# Altium PCB TVP5150AM1.PcbDoc
Units mm, origin at the board's own origin, x right, y up, seen from the top; angles counter-clockwise.
Board outline 55.24 x 53.97 mm, 2 copper layers (Top Layer, Bottom Layer), stack 1.571 mm thick; 45 components, 39 nets, 160 pads, 217 vias.
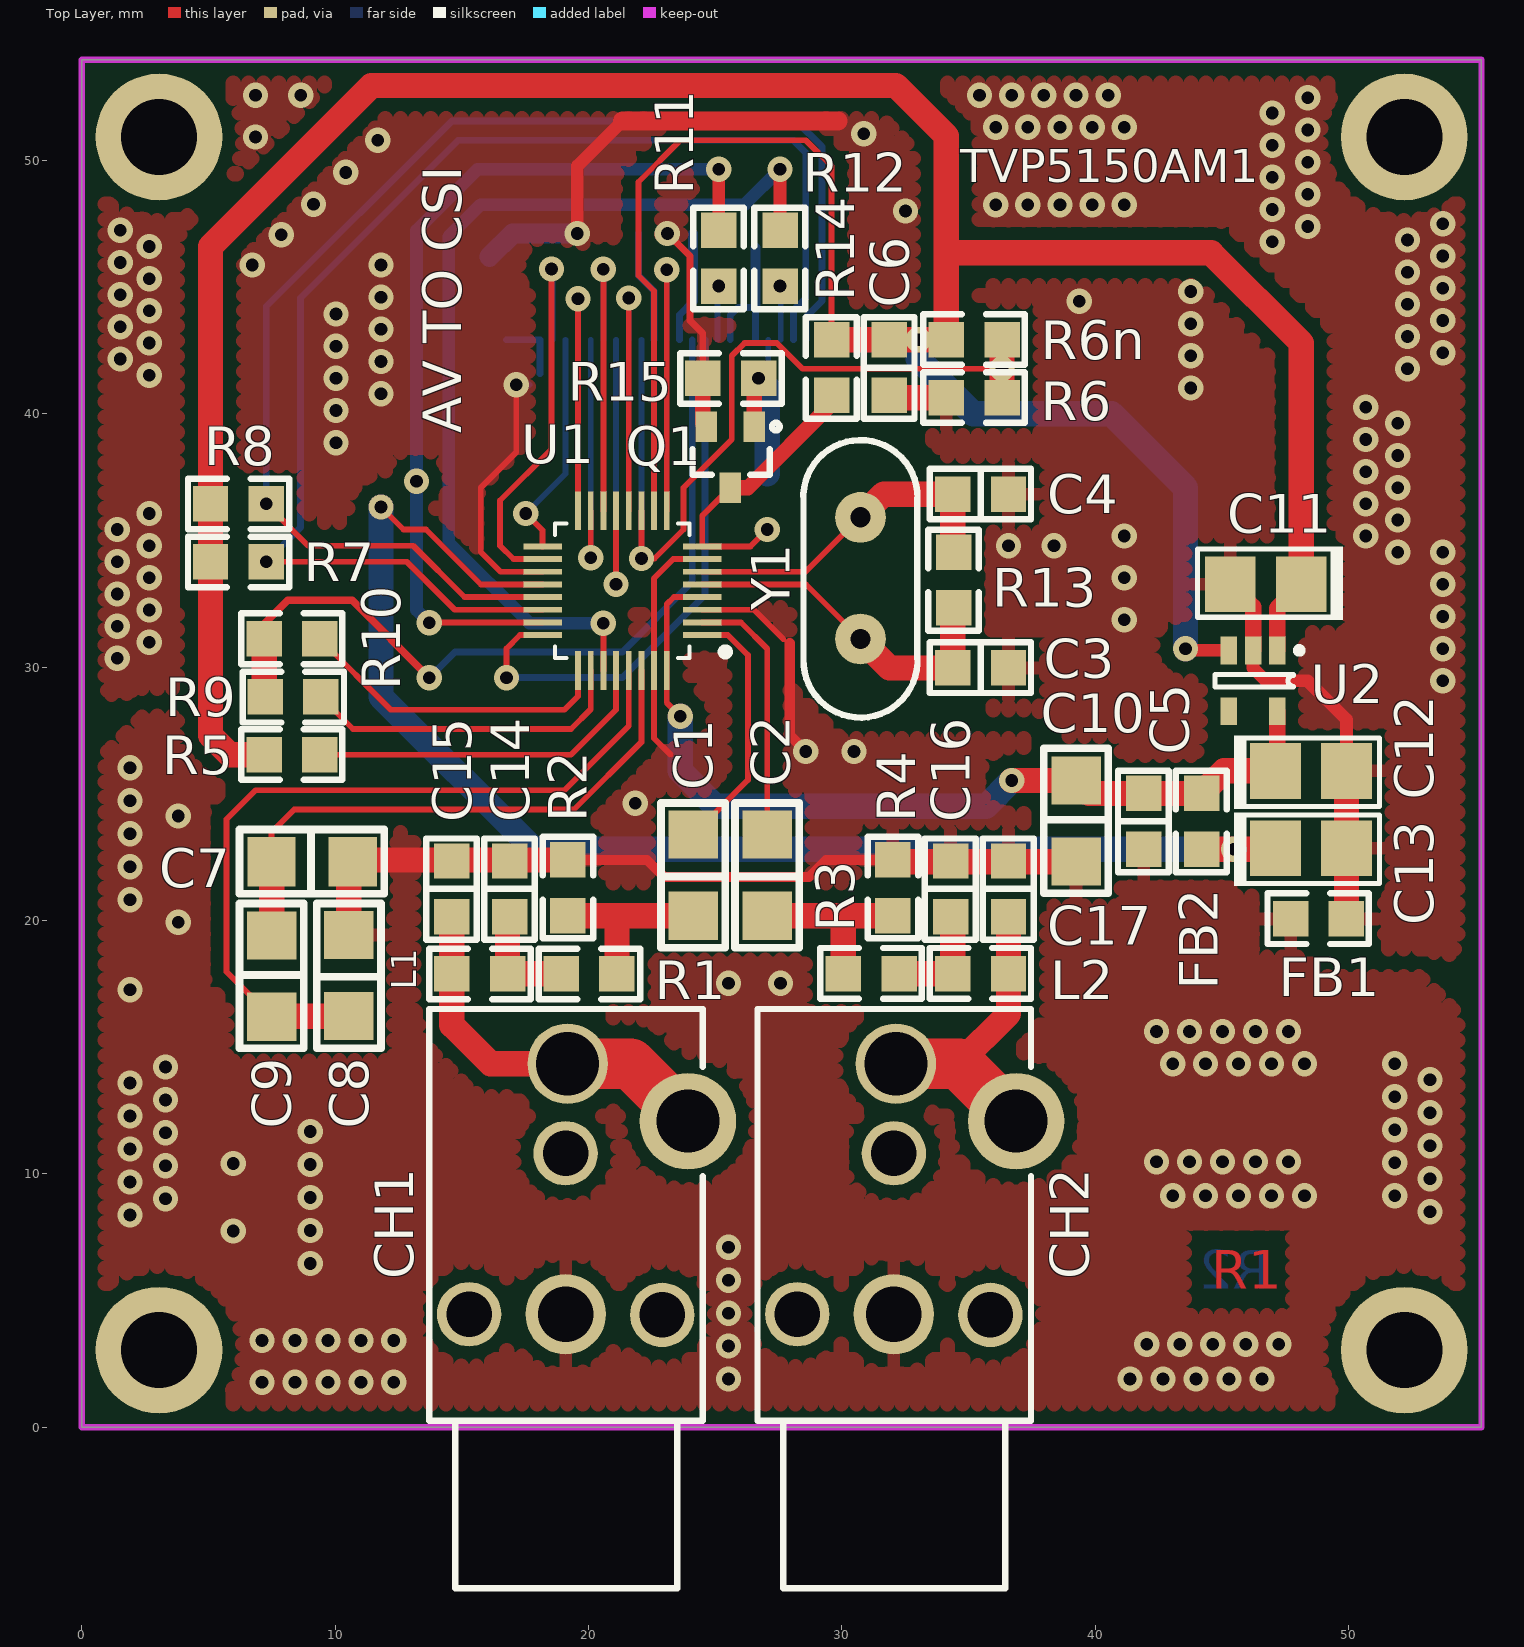
[diagram p0: Top Layer view]
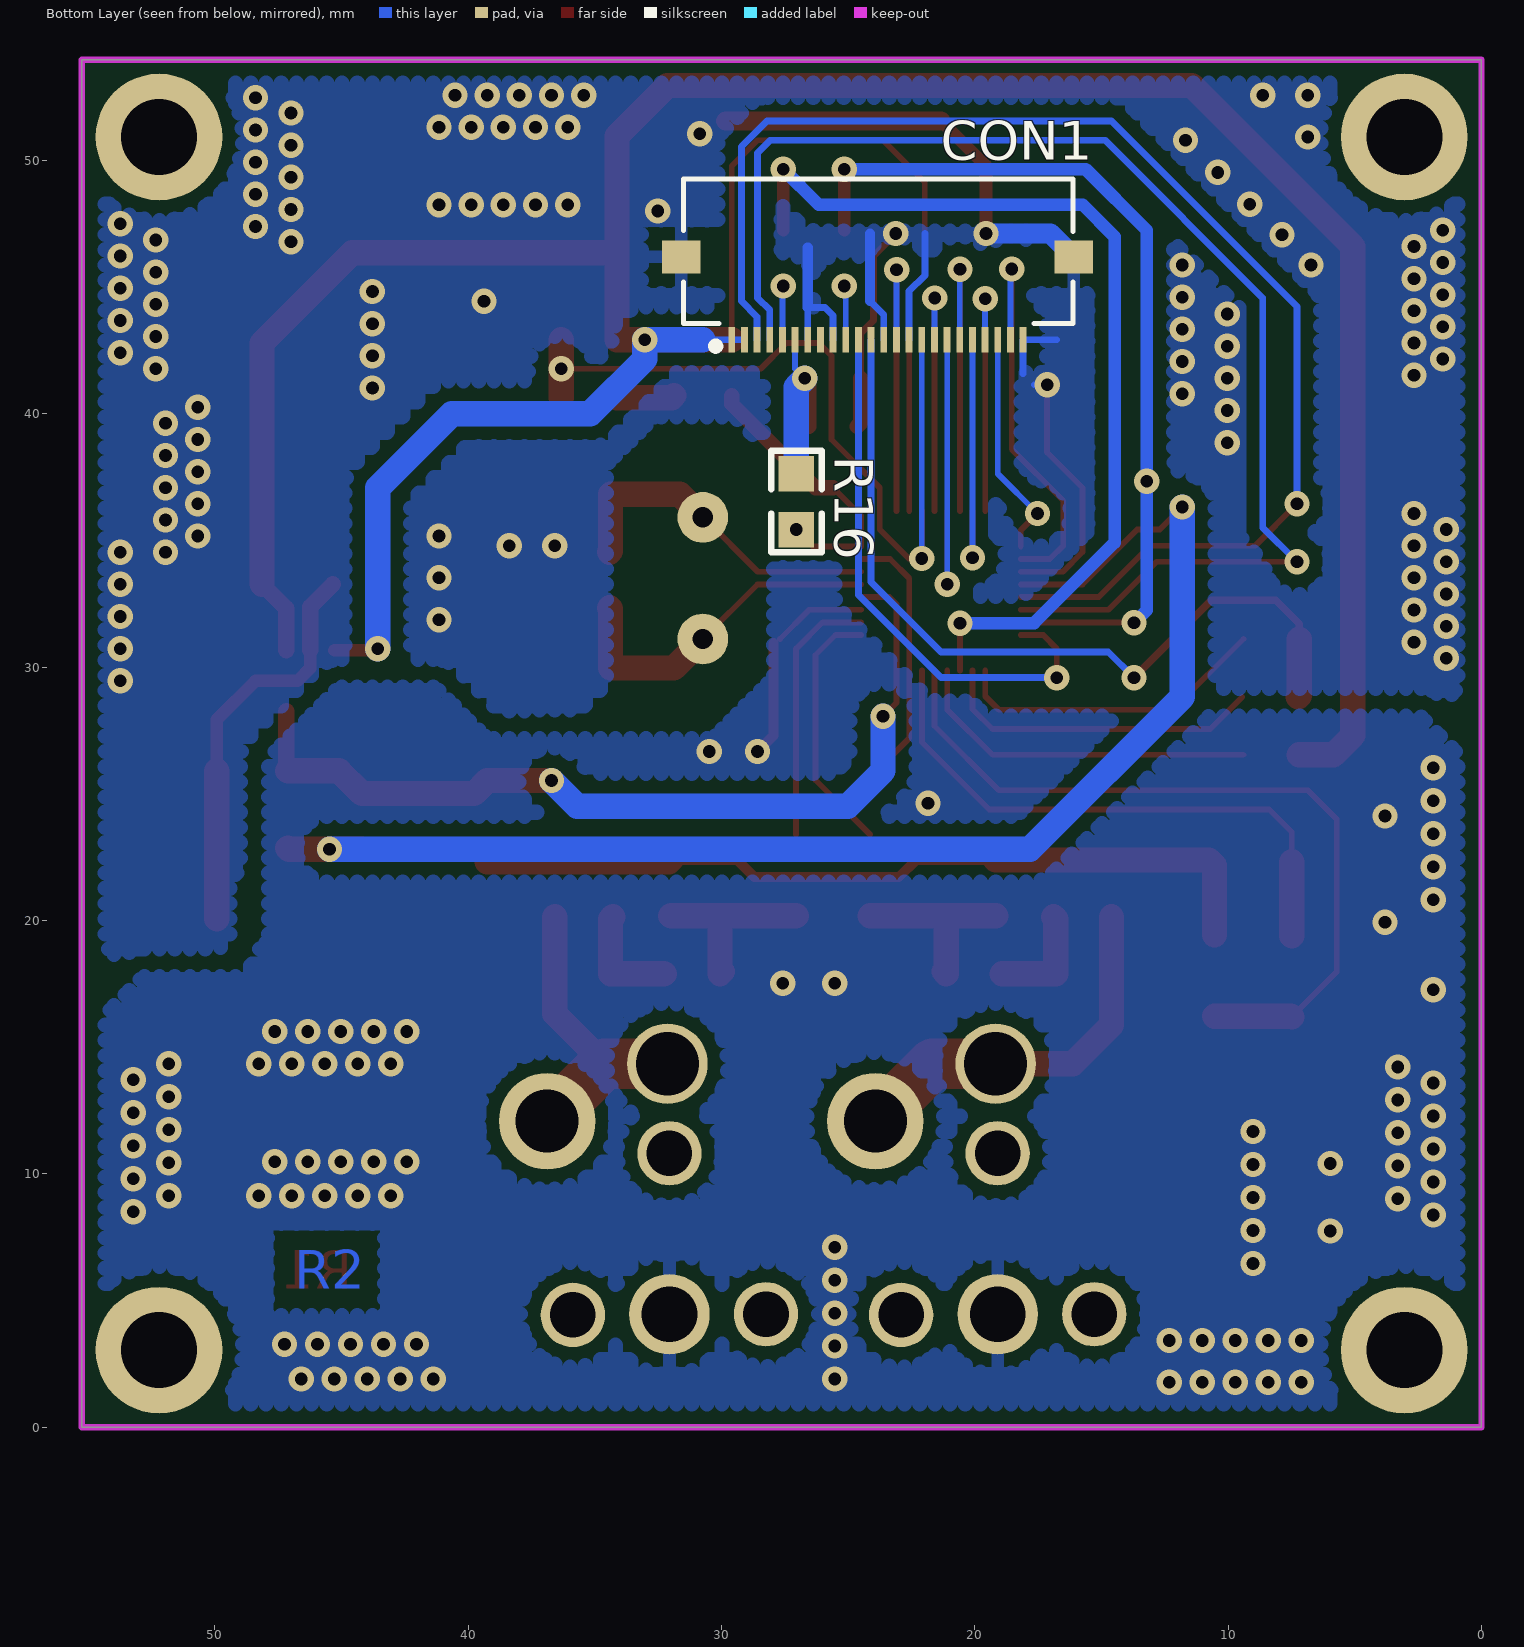
[diagram p1: Bottom Layer view, seen from below]
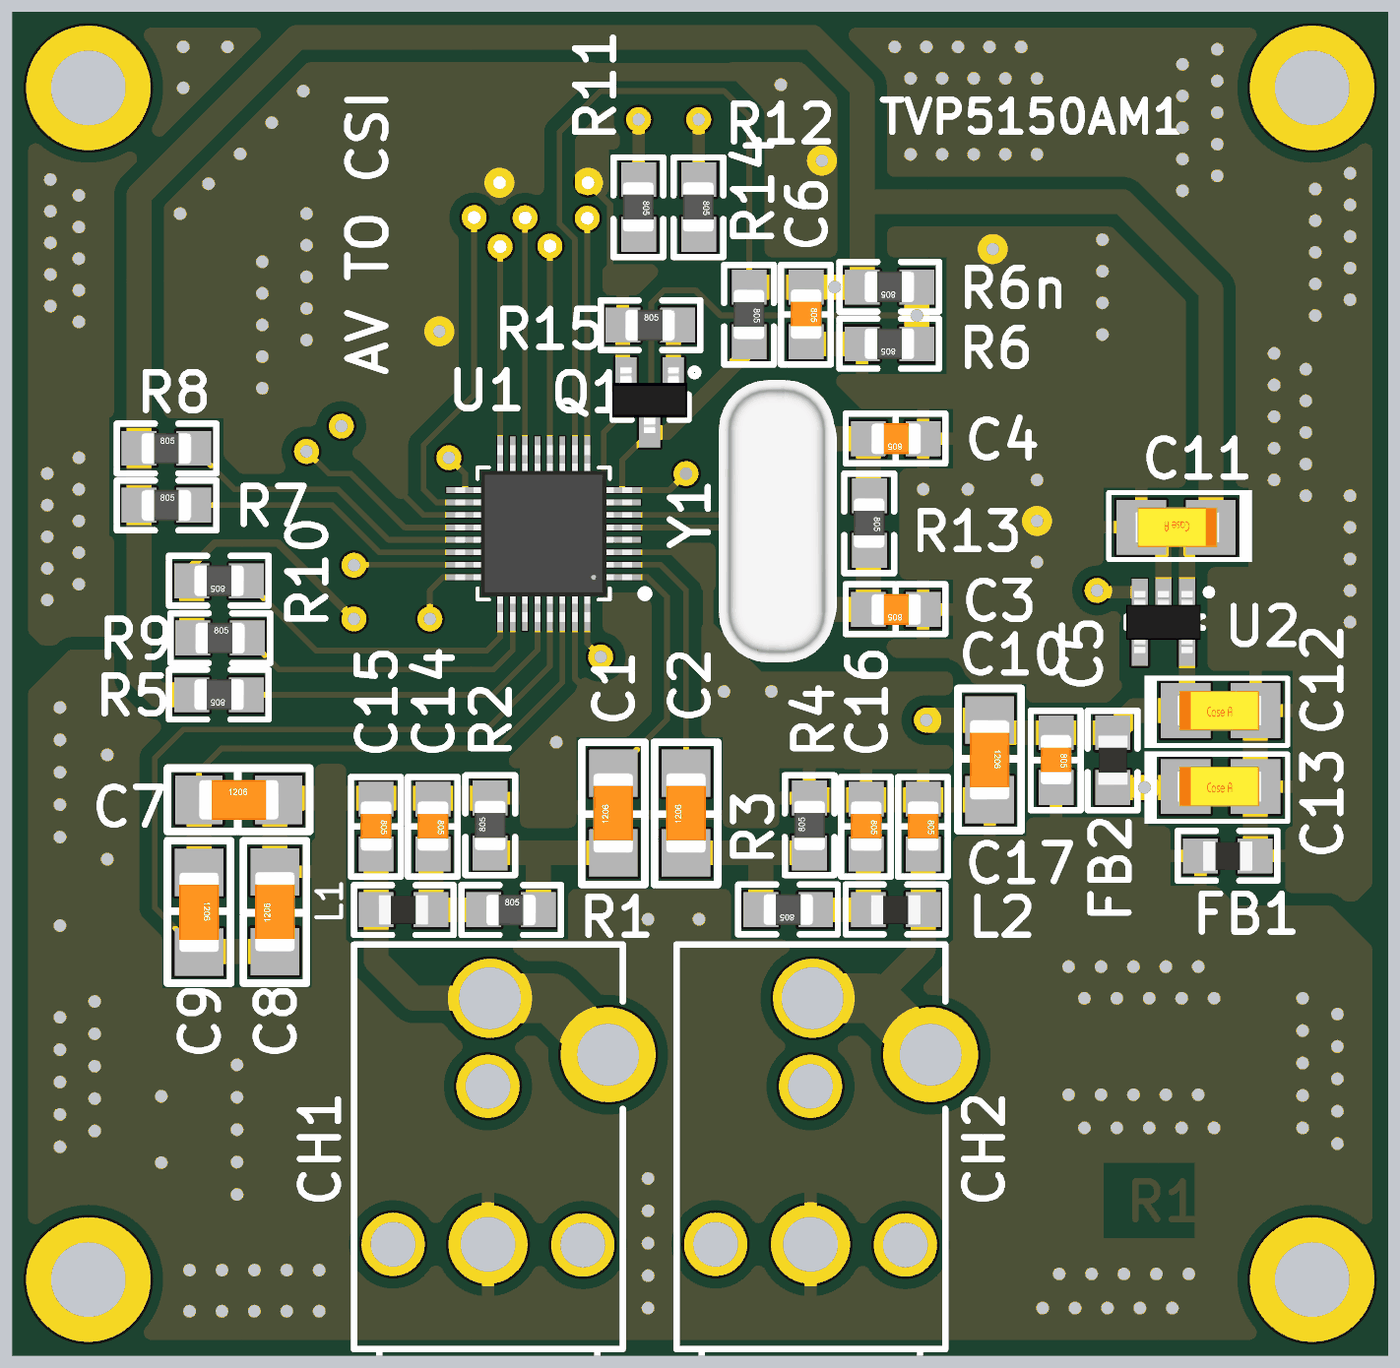
[diagram p2: 3D render of the assembled board from above, using the file's embedded part models]

## Layer stack, top to bottom
Top Solder: solder mask 0.0102, Solder Resist, Dk 3.5
Top Layer: signal copper 0.0356
Dielectric 1: dielectric 1.5, FR-4, Dk 4.8
Bottom Layer: signal copper 0.0356
Bottom Solder: solder mask 0.0102, Solder Resist, Dk 3.5

## Board outline
0,0 0,53.975 55.245,53.975 55.245,0

## Design rules (kind name [scope] priority, off if disabled: settings)
Clearance In_poly [InPolygon] p1: gap=0.5
Clearance [All] p2: gap=0.22
HoleSize [All] p1: absolutevalues=TRUE maxlimit=5 minlimit=0.025 maxpercent=80.000 minpercent=20.000
MinimumSolderMaskSliver [All] p1: minsoldermaskwidth=0.1
PolygonConnect poly_via [IsVia or InPadClass('Direct Connects')] p1: connectstyle=Direct reliefconductorwidth=0.254 reliefentries=4 polygonreliefangle="90 Angle" airgapwidth=0.254
PolygonConnect [All] p2: connectstyle=Relief reliefconductorwidth=0.5 reliefentries=4 polygonreliefangle="90 Angle" airgapwidth=0.5
RoutingVias [All] p1: holewidth=0.5 width=1 viastyle="Through Hole" minholewidth=0.5 minwidth=1 maxholewidth=0.711 maxwidth=1.27
SilkToSilkClearance [All] p1: silktosilkclearance=0.1
SilkToSolderMaskClearance [IsPad] p1: minsilkscreentomaskgap=0.05 clearancetoexposedcopper=TRUE
SolderMaskExpansion [All] p1: expansion=0.102
Width [All] p1: maxlimit=5 minlimit=0.229 preferedwidth=0.254 minimp=50.000000 maximp=50.000000 favimp=50.000000
26 further rules are at their usual default settings.

## Components (designator, comment, footprint, x,y, rotation, side; value= is the part's Value field where it differs from the comment)
C1 "100nF" "C_1206 (3216 METRIC)" 24.13,20.193 r90 top
C2 "100nF" "C_1206 (3216 METRIC)" 27.051,20.193 r90 top
C3 "27PF" "C_0805 (2012 METRIC)" 36.576,29.972 r180 top
C4 "27PF" "C_0805 (2012 METRIC)" 36.576,36.83 r180 top
C5 "100nF" "C_0805 (2012 METRIC)" 41.91,25.019 r270 top
C6 "1000nF" "C_0805 (2012 METRIC)" 31.877,42.926 r270 top
C7 "1uF" "C_1206 (3216 METRIC)" 7.493,22.327 r0 top
C8 "1uF" "C_1206 (3216 METRIC)" 10.541,16.231 r90 top
C9 "1uF" "C_1206 (3216 METRIC)" 7.493,19.406 r270 top
C10 "100nF" "C_1206 (3216 METRIC)" 39.243,25.527 r270 top
C11 "2.2uF" TANTALUM-A 48.133,33.274 r0 top
C12 "2.2uF" TANTALUM-A 47.117,25.908 r180 top
C13 "2.2uF" TANTALUM-A 47.117,22.86 r180 top
C14 "330PF" "C_0805 (2012 METRIC)" 16.891,22.352 r270 top
C15 "330PF" "C_0805 (2012 METRIC)" 14.605,22.352 r270 top
C16 "180PF" "C_0805 (2012 METRIC)" 34.29,22.352 r270 top
C17 "180PF" "C_0805 (2012 METRIC)" 36.576,22.352 r270 top
CH1 "AV CONNECTOR" RCA-CONN 19.177,14.351 r180 top
CH2 "AV CONNECTOR" RCA-CONN 32.131,14.351 r180 top
CON1 "24 PIN FFC CONNECTOR 0.5MM PITCH" FH12-24S-0.5SH 29.591,42.926 r180 bottom
FB1 "MPZ1608S300A" "L_0805 (2012 METRIC)" 49.911,20.066 r180 top
FB2 "MPZ1608S300A" "L_0805 (2012 METRIC)" 44.196,25.019 r270 top
L1 "3.3uH" "L_0805 (2012 METRIC)" 14.605,17.907 r0 top
L2 "2.7uH" "L_0805 (2012 METRIC)" 36.576,17.907 r180 top
Q1 "MMBF170-7-F" SOT-23-3 26.543,39.497 r180 top
R1 "37.4R" "R_0805 (2012 METRIC)" 18.923,17.907 r0 top
R2 "37.4R" "R_0805 (2012 METRIC)" 19.177,20.193 r90 top
R3 "37.4R" "R_0805 (2012 METRIC)" 32.258,17.907 r180 top
R4 "37.4R" "R_0805 (2012 METRIC)" 32.004,20.193 r90 top
R5 "10KR" "R_0805 (2012 METRIC)" 9.398,26.543 r180 top
R6 "10KR" "R_0805 (2012 METRIC)" 36.322,40.64 r180 top
R6n "NC(10KR)" "R_0805 (2012 METRIC)" 36.322,42.926 r180 top
R7 "1.2KR" "R_0805 (2012 METRIC)" 5.08,34.163 r0 top
R8 "1.2KR" "R_0805 (2012 METRIC)" 5.08,36.449 r0 top
R9 "NC (0R)" "R_0805 (2012 METRIC)" 7.239,28.829 r0 top
R10 "0R" "R_0805 (2012 METRIC)" 9.398,31.115 r180 top
R11 "NC (0R)" "R_0805 (2012 Metric)" 25.146,47.244 r270 top
R12 "NC (0R)" "R_0805 (2012 Metric)" 27.559,47.244 r270 top
R13 "100KR" "R_0805 (2012 Metric)" 34.417,34.544 r270 top
R14 "4.7KR" "R_0805 (2012 Metric)" 29.591,42.926 r270 top
R15 "100KR" "R_0805 (2012 Metric)" 24.511,41.402 r0 top
R16 "NC (0R)" "R_0805 (2012 Metric)" 27.051,35.433 r90 bottom
U1 "TVP5150AM1PBS" PBS32 21.336,33.02 r180 top
U2 "XC6219B182MR" SOT23-5 46.228,29.464 r270 top
Y1 "14.31818MHz" XTAL_S 30.734,31.115 r90 top

## Footprints (in the part's own frame and the unit in brackets; to place one, negate y for a bottom-side part, rotate by r counter-clockwise, add the part's x,y. Pads: shape width x height; smd on the part's side, far side on the other; paste and mask are expansions set on the pad)
"C_0805 (2012 METRIC)" [mm] "SMD Capacitor"
  rect 1.4x1.4 smd: 1(0,0) 2(2.2,0)
  silkscreen extent -0.89,-1.01 3.11,0.99, body extent 0.08,-0.63 2.08,0.62, height 0.78
"C_1206 (3216 METRIC)" [mm] "SMD Capacitor"
  rect 1.9x1.95 smd: 1(0,0) 2(3.2,0)
  silkscreen extent -1.27,-1.27 4.44,1.27, body extent 0,-0.8 3.2,0.8, height 1
FH12-24S-0.5SH [mm]
  rect 0.27x1 smd mask+0.05: 1(0,0) 2(0.5,0) 3(1,0) 4(1.5,0) 5(2,0) 6(2.5,0) 7(3,0) 8(3.5,0) 9(4,0) 10(4.5,0) 11(5,0) 12(5.5,0) 13(6,0) 14(6.5,0) 15(7,0) 16(7.5,0) 17(8,0) 18(8.5,0) 19(9,0) 20(9.5,0) 21(10,0) 22(10.5,0) 23(11,0) 24(11.5,0)
  rect 1.524x1.3 smd: 25(-2,3.273) 26(13.5,3.273)
  silkscreen extent -1.91,-0.4 13.46,6.35, body extent -2.3,-0.13 13.8,6.27, height 2.1
"L_0805 (2012 METRIC)" [mm] "SMD Inductor"
  rect 1.4x1.4 smd: 1(0,0) 2(2.2,0)
  silkscreen extent -0.89,-1.01 3.11,0.99, body extent 0.1,-0.6 2.1,0.6, height 0.95
PBS32 [mil]
  rect 60x9 smd mask+1.97: 1(-124,68.9) 2(-124,49.21) 3(-124,29.53) 4(-124,9.84) 5(-124,-9.84) 6(-124,-29.53) 7(-124,-49.21) 8(-124,-68.9) 17(124,-68.9) 18(124,-49.21) 19(124,-29.53) 20(124,-9.84) 21(124,9.84) 22(124,29.53) 23(124,49.21) 24(124,68.9)
  rect 9x60 smd mask+1.97: 9(-68.9,-124) 10(-49.21,-124) 11(-29.53,-124) 12(-9.84,-124) 13(9.84,-124) 14(29.53,-124) 15(49.21,-124) 16(68.9,-124) 25(68.9,124) 26(49.21,124) 27(29.53,124) 28(9.84,124) 29(-9.84,124) 30(-29.53,124) 31(-49.21,124) 32(-68.9,124)
  silkscreen extent -166,-105 105,105, body extent -140,-140 140,140, height 47
"R_0805 (2012 METRIC)" [mm] "SMD Resistor"
  rect 1.4x1.4 smd: 1(0,0) 2(2.2,0)
  silkscreen extent -0.89,-1.01 3.11,0.99, body extent 0.1,-0.64 2.1,0.62, height 0.78
"R_0805 (2012 Metric)" [mm] "SMD Resistor"
  rect 1.4x1.4 smd: 1(0,0) 2(2.2,0)
  silkscreen extent -0.89,-1.01 3.11,0.99, body extent 0.1,-0.64 2.1,0.62, height 0.78
RCA-CONN [mm]
  round 3.81 hole 2.489: 1(-4.746,2.267)
  round 3.175 hole 2.489: 1(0,0)
  round 3.175 hole 2.2: 2(0.08,9.887)
  round 2.54 hole 1.8: MH1(0.08,3.537) MH2(-3.73,9.912) MH3(3.89,9.887)
  silkscreen extent -5.33,-2.16 5.46,20.7
SOT23-5 [mm] "SOT23, 6-Leads, Body 2.9x1.6mm, Pitch 0.95mm, Lead Span 2.7mm, IPC Medium Density"
  rect 1.1x0.65 smd mask+0.05: 1(-1.2,0.95) 2(-1.2,0) 3(-1.2,-0.95)
  rect 1.1x0.65 smd: 4(1.2,-0.95) 5(1.2,0.95)
  silkscreen extent -1.32,-1.5 0.25,1.95, body extent -1.25,-1.5 1.25,1.5, height 1.01
SOT-23-3 [mm]
  rect 0.85x1.2 smd: 1(0,0) 2(1.9,0) 3(0.95,2.413)
  silkscreen extent -1,-0.15 2.44,1.9, body extent -0.55,-0.2 2.45,2.44, height 1.08
TANTALUM-A [mm] "1206 (3216 Metric) Tantalum A"
  rect 2x2.2 smd: 1(0,0) 2(-2.8,0)
  silkscreen extent -4.1,-1.4 1.65,1.5, body extent -3.05,-0.8 0.35,0.8, height 1.65
XTAL_S [mm] "Xtal Short Height P=4.8mm"
  round 2 hole 0.8: 1(0,0) 2(4.8,0)
  silkscreen extent -3.1,-2.25 7.85,2.25, body extent -3.27,-2.29 8.08,2.36, height 2.4

## Part data
C1 C2 C7 C8 C9 C10 C11 C12 C13: library part "Cap Pol SMD", "Polarized Capacitor"
C3 C4 C5 C6 C14 C15 C16 C17: library part Cap, "Capacitor"
CH1 CH2: library part "Header 2", "Header, 2-Pin"
CON1: library part "CSI DVP CAMERA CONNECTOR", "CONN FFC BOTTOM 24POS 0.50MM R/A"
FB1 FB2 L1 L2: library part Inductor, "Inductor"
Q1: library part MESFET-N, "MOSFET N-CH 60V 500MA SOT23-3"
R1 R2 R3 R4 R5 R6 R6n R7 R8 R9 R10 R11 R12 R13 R14 R15 R16: library part Res1, "Resistor"
U1: "Ultralow Power NTSC/PAL/SECAM 9-Bit Video Decoder with Robust Sync Detector, 32-Pin TQFP"
Y1: library part XTAL, "CRYSTAL 14.7456MHZ 18PF THRU"

## Free pads (board coordinates)
  round 5 hole 3 unplated: MH-1(3.048,3.048) MH-2(3.048,50.927) MH-3(52.197,50.927) MH-4(52.197,3.048)

## Via types
v1: diameter 1, hole 0.5, Top Layer to Bottom Layer, tented both sides, 182 vias
v2: diameter 1, hole 0.5, Top Layer to Bottom Layer, 35 vias

## Nets (pads, with @x,y where several pads share a name; then routed paths per layer and width w, separated by ;. In a path a pad name is that pad's centre, name@x,y a point inside that pad or via, vN(x,y) a via of type N, cw(c..) or ccw(c..) an arc to the next point about the centre after c; other vN are vias at no path point)
+1V8: C5.1 C10.1 C12.1 FB2.1 U1.4 U1.32 U2.5 | length 35.8
  Top Layer w0.229: v2(23.622,28.067) 23.086,28.603 U1.32 23.086,32.484 23.372,32.77 U1.4
  Top Layer w0.65: C12.1 47.178,25.969 U2.5
  Top Layer w1: v2(36.703,25.527) C10.1 39.751,25.019 C5.1 FB2.1 45.085,25.908 C12.1
  Bottom Layer w1: v2(23.622,28.067) 23.622,25.908 25.019,24.511 35.687,24.511 v2(36.703,25.527)
+1V8D: C13.1 FB2.2 U1.20 | length 54.5
  Top Layer w0.229: v2@11.811,36.068 v2(11.811,36.322) 12.7,35.433 13.589,35.433 15.752,33.27 U1.20
  Top Layer w1: FB2.2 v2(45.466,22.819) 47.076,22.819 C13.1
  Bottom Layer w1: v2(11.811,36.322) 11.811,28.829 17.821,22.819 v2(45.466,22.819)
+3V3: C6.1 C11.1 CON1.1 CON1.2 R5.2 R6n.2 R7.1 R8.1 R14.1 U1.10 U2.1 U2.3 | length 149.1
  Top Layer w0.229: U1.10 22.586,44.851 21.971,45.466 21.971,49.149 23.622,50.8 28.575,50.8 29.591,49.784 R14.1
  Top Layer w0.5: v2(43.561,30.734) 43.631,30.664 U2.3
  Top Layer w0.65: U2.1 47.178,32.319 C11.1
  Top Layer w1: R5.2 5.842,26.543 5.08,27.305 R7.1 R8.1 5.08,46.609 11.43,52.959 32.131,52.959 34.122,50.968 34.122,46.355 ; R14.1 C6.1 v2(33.02,42.926) R6n.2 34.122,46.355 ; C11.1 48.133,42.799 44.577,46.355 34.122,46.355
  Bottom Layer w0.27: CON1.2 CON1.1 30.734,42.926
  Bottom Layer w1: 30.734,42.926 v2(33.02,42.926) 33.02,42.164 35.179,40.005 40.64,40.005 43.561,37.084 v2(43.561,30.734)
AGND: C5.2 C7.2 C8.2 C10.2 C14.1 C15.1 C16.1 C17.1 CH1.2 CH2.2 FB1.2 R2.2 R4.2 U1.3 U1.7 U1.31 | length 49.8
  Top Layer w0.229: 23.241,26.543 22.586,27.198 U1.31 22.586,33.508 23.348,34.27 U1.7 ; U1.3 26.531,32.27 27.686,31.115
  Top Layer w0.4: R2.2 22.311,22.393 22.987,21.717 28.702,21.717 29.378,22.393 R4.2 ; 27.94,30.948 27.94,27.311 v1(28.575,26.676)
  Top Layer w1: C8.2 10.541,22.175 C7.2 10.759,22.393 R2.2 ; R4.2 32.07,22.327 C10.2
  other v1: 7.112,1.778 8.414,1.778 9.716,1.778 11.017,1.778 12.319,1.778 25.527,1.905 41.374,1.905 42.676,1.905 43.978,1.905 45.28,1.905 46.581,1.905 25.527,3.207 42.037,3.276 43.339,3.276 44.64,3.276 45.942,3.276 47.244,3.276 7.112,3.429 8.414,3.429 9.716,3.429 11.017,3.429 12.319,3.429 25.527,4.508 25.527,5.81 9.017,6.469 25.527,7.112 5.974,7.747 9.017,7.771 1.905,8.382 53.213,8.509 3.302,9.017 9.017,9.072 43.053,9.144 44.355,9.144 45.657,9.144 46.958,9.144 48.26,9.144 51.816,9.144 1.905,9.684 53.213,9.811 3.302,10.319 9.017,10.374 5.974,10.414 51.816,10.446 42.418,10.476 43.72,10.476 45.021,10.476 46.323,10.476 47.625,10.476 1.905,10.986 53.213,11.112 3.302,11.62 9.017,11.676 51.816,11.747 1.905,12.287 53.213,12.414 3.302,12.922 51.816,13.049 1.905,13.589 53.213,13.716 3.302,14.224 43.053,14.351 44.355,14.351 45.657,14.351 46.958,14.351 48.26,14.351 51.816,14.351 42.418,15.621 43.72,15.621 45.021,15.621 46.323,15.621 47.625,15.621 1.905,17.272 25.527,17.526 27.574,17.526 3.81,19.939 1.905,20.828 1.905,22.13 1.905,23.431 3.81,24.13 21.844,24.638 1.905,24.733 1.905,26.035 30.48,26.676
AVID: R9.2 U1.26 | length 13
  Top Layer w0.229: R9.2 10.709,27.559 19.304,27.559 20.086,28.341 U1.26
CH1_IN: C15.2 CH1.1 L1.1 | length 15.2
  Top Layer w1: C15.2 L1.1 14.605,15.875 16.129,14.351 CH1.1@19.177,14.351
  Top Layer w2: CH1.1@19.177,14.351 21.656,14.351 CH1.1@23.923,12.084
CH2_IN: C17.2 CH2.1 L2.1 | length 12.3
  Top Layer w1: 34.61,14.351 36.576,16.317 L2.1 C17.2
  Top Layer w2: CH2.1@32.131,14.351 34.61,14.351 CH2.1@36.877,12.084
GND: C3.1 C4.1 C6.2 C11.2 C12.2 C13.2 CON1.7 CON1.9 CON1.13 CON1.15 CON1.24 CON1.25 CON1.26 FB1.1 Q1.2 R6.2 R15.1 U1.19 U2.2 | length 71.8
  Top Layer w0.229: v2(17.145,41.148) 17.145,38.481 15.748,37.084 15.748,34.544 16.522,33.77 U1.19
  Top Layer w0.27: v2(23.114,47.117) 24.003,46.228 24.003,43.688 24.511,43.18 R15.1
  Top Layer w0.5: v2(19.558,47.117) 19.558,49.784 21.336,51.562 ; U2.2 46.228,29.972 46.736,29.464 48.387,29.464 49.917,27.934 C12.2
  Top Layer w0.6: R15.1 24.511,39.629 Q1.2
  Top Layer w0.65: C11.2 46.228,32.379 U2.2
  Top Layer w0.75: 21.336,51.562 29.845,51.562
  Top Layer w1: C6.2 31.963,40.64 R6.2 ; FB1.1 49.917,20.072 C13.2 C12.2
  Bottom Layer w0.27: 16.764,42.926 CON1.24 18.091,41.586 ; v2(17.145,41.148) 17.653,41.148 ; 21.971,47.117 21.971,45.466 22.591,44.846 CON1.15 ; CON1.13 23.591,43.911 24.13,44.45 ; CON1.9 25.591,43.879 25.908,44.196 26.591,44.196 CON1.7
  Bottom Layer w0.4: 24.13,44.45 24.13,47.117 ; 26.591,44.196 26.591,46.561
  Bottom Layer w0.8: CON1.26 17.009,47.117 v2(19.558,47.117)
  other v1: 53.721,29.464 1.397,30.353 53.721,30.734 2.667,30.988 1.397,31.623 41.148,31.877 53.721,32.004 2.667,32.258 1.397,32.893 53.721,33.274 2.667,33.528 1.397,34.163 51.943,34.544 53.721,34.544 2.667,34.798 36.576,34.798 38.374,34.798 41.148,35.179 50.673,35.179 1.397,35.433 51.943,35.814 2.667,36.068 50.673,36.449 51.943,37.084 50.673,37.719 51.943,38.354 10.033,38.862 50.673,38.989 51.943,39.624 10.033,40.132 50.673,40.259 11.811,40.796 43.774,41.021 10.033,41.402 2.667,41.529 52.324,41.783 11.811,42.066 1.524,42.164 43.774,42.291 53.721,42.418 10.033,42.672 2.667,42.799 52.324,43.053 11.811,43.336 1.524,43.434 43.774,43.561 53.721,43.688 10.033,43.942 2.667,44.069 52.324,44.323 11.811,44.606 1.524,44.704 43.774,44.831 53.721,44.958 2.667,45.339 52.324,45.593 6.731,45.876 11.811,45.876 1.524,45.974 53.721,46.228 2.667,46.609 46.99,46.796 52.324,46.863 7.874,47.076 1.524,47.244 48.387,47.396 53.721,47.498 46.99,48.066 36.068,48.26 37.338,48.26 38.608,48.26 39.878,48.26 41.148,48.26 9.144,48.276 48.387,48.666 46.99,49.336 10.414,49.53 48.387,49.936 46.99,50.606 11.684,50.8 6.858,50.927 30.861,51.054 48.387,51.206 36.068,51.308 37.338,51.308 38.608,51.308 39.878,51.308 41.148,51.308 46.99,51.876 48.387,52.476 6.858,52.578 8.636,52.578 35.433,52.578 36.703,52.578 37.973,52.578 39.243,52.578 40.513,52.578
  other v2: 41.148,33.528 39.37,44.45 32.512,48.006
GPIO/INT: CON1.5 R12.2 | length 2.1
  Bottom Layer w0.229: v2(27.559,45.044) 27.591,45.012 CON1.5
NetC1_2: C1.2 U1.1 | length 10.1
  Top Layer w0.229: C1.2 26.289,25.552 26.289,30.48 25.499,31.27 U1.1
NetC2_2: C2.2 U1.2 | length 10.3
  Top Layer w0.229: U1.2 26.015,31.77 27.051,30.734 C2.2
NetC14_2: C14.2 L1.2 R1.1 | length 4.4
  Top Layer w1: C14.2 16.805,20.066 L1.2 R1.1
NetC16_2: C16.2 L2.2 R3.1 | length 4.4
  Top Layer w1: R3.1 L2.2 34.376,20.066 C16.2
NetCON1_10: CON1.10 R11.2 | length 2.1
  Bottom Layer w0.229: CON1.10 25.091,44.989 v2(25.146,45.044)
NetR5_1: R5.1 U1.28 | length 14
  Top Layer w0.229: R5.1 19.304,26.543 21.086,28.325 U1.28
OV_D0: CON1.23 U1.18 | length 16.5
  Top Layer w0.229: U1.18 17.038,34.27 16.51,34.798 16.51,36.576 18.542,38.608 v2(18.542,45.72)
  Bottom Layer w0.229: v2(18.542,45.72) 18.591,45.671 CON1.23
OV_D1: CON1.22 U1.17 | length 9.1
  Top Layer w0.229: v2(17.526,36.068) 18.186,35.408 U1.17
  Bottom Layer w0.229: v2(17.526,36.068) 19.091,37.633 CON1.22
OV_D2: CON1.21 U1.16 | length 10
  Top Layer w0.229: U1.16 v2(19.586,44.549)
  Bottom Layer w0.229: v2(19.586,44.549) 19.591,44.544 CON1.21
OV_D3: CON1.20 U1.15 | length 10.5
  Top Layer w0.229: U1.15 20.086,34.32 v2(20.091,34.315)
  Bottom Layer w0.229: v2(20.091,34.315) CON1.20
OV_D4: CON1.19 U1.14 | length 12.3
  Top Layer w0.229: U1.14 v2(20.586,45.708)
  Bottom Layer w0.229: v2(20.586,45.708) 20.591,45.703 CON1.19
OV_D5: CON1.18 U1.13 | length 12.5
  Top Layer w0.229: v2(21.086,33.278) U1.13
  Bottom Layer w0.229: v2(21.086,33.278) 21.086,42.921 CON1.18
OV_D6: CON1.17 U1.12 | length 10.1
  Top Layer w0.229: U1.12 v2(21.586,44.573)
  Bottom Layer w0.229: v2(21.586,44.573) 21.591,44.568 CON1.17
OV_D7: CON1.16 R6.1 R6n.1 U1.11 | length 33.9
  Top Layer w0.229: U1.11 22.086,34.295 v2(22.091,34.29) 22.606,34.29 23.749,35.433 23.749,37.084 25.654,38.989 25.654,42.291 26.162,42.799 27.432,42.799 28.448,41.783 v2(36.322,41.783)
  Top Layer w1: R6.1 v2(36.322,41.783) R6n.1
  Bottom Layer w0.229: v2(22.091,34.29) CON1.16
OV_DCLK: CON1.14 U1.9 | length 12.3
  Top Layer w0.229: U1.9 v2(23.086,45.692)
  Bottom Layer w0.229: v2(23.086,45.692) 23.091,45.687 CON1.14
OV_FID: R11.1 U1.23 | length 35.5
  Top Layer w0.229: v2@13.716,31.77 U1.23
  Top Layer w0.5: R11.1 v2(25.146,49.657)
  Bottom Layer w0.5: v2(13.716,31.75) 13.208,32.258 v2(13.208,37.338) 13.208,47.244 15.621,49.657 v2(25.146,49.657)
OV_HS: CON1.12 R9.1 R10.2 | length 32.6
  Top Layer w0.3: R10.2 7.198,31.709 8.128,32.639 10.668,32.639 v2(13.716,29.591)
  Top Layer w1: R10.2 7.198,28.87 R9.1
  Bottom Layer w0.27: v2(13.716,29.591) 14.732,30.607 21.336,30.607 24.091,33.362 CON1.12
OV_VS: CON1.11 U1.24 | length 22
  Top Layer w0.229: v2(16.764,29.591) 16.764,30.734 17.3,31.27 U1.24
  Bottom Layer w0.27: v2(16.764,29.591) 21.336,29.591 24.591,32.846 CON1.11
REFM: C7.1 C9.1 U1.30 | length 23
  Top Layer w0.229: C7.1 7.493,23.495 8.382,24.384 19.431,24.384 22.086,27.039 U1.30
  Top Layer w1: C9.1 C7.1
REFP: C8.1 C9.2 U1.29 | length 31.2
  Top Layer w0.229: C9.2 5.715,17.984 5.715,24.003 6.858,25.146 19.05,25.146 21.586,27.682 U1.29
  Top Layer w1: C9.2 7.518,16.231 C8.1
RESET: CON1.6 Q1.1 R15.2 R16.2 | length 7.6
  Top Layer w0.6: Q1.1 26.543,41.234 v2(26.711,41.402)
  Bottom Layer w0.229: v2(26.711,41.402) 27.091,41.782 CON1.6
  Bottom Layer w1: v2(26.711,41.402) 27.051,41.062 R16.2
TVP_HS: R10.1 U1.25 | length 12.6
  Top Layer w0.229: R10.1 12.192,28.321 19.05,28.321 19.586,28.857 U1.25
TVP_INTRQ: R12.1 U1.27 | length 38
  Top Layer w0.229: U1.27 v2(20.586,31.738)
  Top Layer w0.5: R12.1 v2(27.559,49.657)
  Bottom Layer w0.5: v2(20.586,31.738) 17.665,31.738 14.478,34.925 14.478,46.99 15.748,48.26 26.162,48.26 v2(27.559,49.657)
TVP_RESET: Q1.3 R14.2 R16.1 U1.8 | length 11.3
  Top Layer w0.229: Q1.3 24.486,35.977 U1.8 26.388,34.77 v2(27.051,35.433)
  Top Layer w0.6: Q1.3 26.289,37.084 29.591,40.386 R14.2
TVP_SCL: CON1.3 R8.2 U1.21 | length 53.5
  Top Layer w0.229: v2(7.28,36.449) 8.931,34.798 13.081,34.798 15.109,32.77 U1.21
  Bottom Layer w0.27: v2(7.28,36.449) 7.28,44.237 14.605,51.562 28.194,51.562 29.21,50.546 29.21,44.45 28.591,43.831 CON1.3
TVP_SDA: CON1.4 R7.2 U1.22 | length 53
  Top Layer w0.229: v2(7.28,34.163) 12.827,34.163 14.72,32.27 U1.22
  Bottom Layer w0.27: v2(7.28,34.163) 8.636,35.519 8.636,44.577 14.859,50.8 28.067,50.8 28.575,50.292 28.575,44.577 28.091,44.093 CON1.4
V1: C1.1 R1.2 R2.1 | length 7.3
  Top Layer w1: R2.1 C1.1 ; 21.123,20.152 R1.2 R1.2@21.209,17.993
V2: C2.1 R3.2 R4.1 | length 7.3
  Top Layer w1: C2.1 R4.1 ; R3.2@29.972,17.993 R3.2 30.058,20.107
XTAL1: C3.2 R13.2 U1.5 Y1.1 | length 13.6
  Top Layer w0.229: U1.5 28.579,33.27 Y1.1
  Top Layer w1: Y1.1 31.877,29.972 C3.2 34.376,32.303 R13.2
XTAL2: C4.2 R13.1 U1.6 Y1.2 | length 13.5
  Top Layer w0.229: U1.6 28.563,33.77 Y1.2@30.721,35.928
  Top Layer w1: Y1.2 31.649,36.83 C4.2 34.376,34.585 R13.1
pads on no net: CH1.MH1 CH1.MH2 CH1.MH3 CH2.MH1 CH2.MH2 CH2.MH3 CON1.8 U2.4

## Polygon pours and split planes (outlines as drawn)
GND on Top Layer "GND_TOP" (hatched 90Degree grid 0.6 track 0.6, remove dead copper, pour order 4): 54.991,53.721 54.991,19.685 53.848,18.542 50.165,18.542 49.403,19.304 49.403,21.59 48.26,22.733 48.174,22.819 45.466,22.819 41.697,22.819 40.513,24.003 38.735,25.781 38.735,27.305 37.719,28.321 35.56,28.321 34.544,29.337 34.544,31.369 34.544,37.973 32.893,39.624 32.639,39.878 29.845,39.878 29.464,39.878 27.432,37.846 27.432,34.925 27.051,34.544 21.59,34.544 15.875,28.829 1.27,28.829 0.381,29.718 0.381,30.226 0.381,53.721
AGND on Top Layer "AGND_TOP" (hatched 90Degree grid 0.6 track 0.6, remove dead copper, pour order 0): 54.991,0.254 54.991,15.621 52.959,17.653 52.832,17.78 49.022,17.78 48.229,18.573 48.229,18.879 47.879,19.229 47.879,21.717 47.879,26.416 45.085,29.21 41.275,29.21 39.624,27.559 39.243,27.178 34.036,27.178 29.972,27.178 27.94,29.21 27.94,34.29 27.051,35.179 25.654,35.179 21.463,35.179 20.701,34.417 20.701,29.21 19.558,28.067 2.413,28.067 0.381,26.035 0.381,0.254
GND on Bottom Layer "GND_BOTTOM" (hatched 90Degree grid 0.6 track 0.6, remove dead copper, pour order 6): 54.991,53.721 54.991,19.685 53.848,18.542 50.165,18.542 49.403,19.304 49.403,21.59 48.26,22.733 48.174,22.819 45.466,22.819 41.697,22.819 40.513,24.003 38.735,25.781 38.735,27.305 37.719,28.321 35.56,28.321 34.544,29.337 34.544,31.369 34.544,37.973 32.893,39.624 32.639,39.878 29.845,39.878 29.464,39.878 27.432,37.846 27.432,34.925 26.797,34.29 26.543,34.036 21.082,34.036 15.875,28.829 1.27,28.829 0.381,29.718 0.381,30.226 0.381,53.721 54.991,53.721
AGND on Bottom Layer "AGND_TOP" (hatched 90Degree grid 0.6 track 0.6, remove dead copper, pour order 2): 54.991,0.254 54.991,15.621 52.959,17.653 52.832,17.78 49.022,17.78 48.229,18.573 48.229,18.879 47.879,19.229 47.879,21.717 47.879,26.416 45.085,29.21 41.275,29.21 39.624,27.559 39.243,27.178 34.036,27.178 30.353,27.178 28.321,29.21 27.94,29.591 27.94,34.29 27.051,35.179 25.654,35.179 21.463,35.179 20.701,34.417 20.701,29.21 19.558,28.067 2.413,28.067 0.381,26.035 0.381,0.254 54.991,0.254

## Keep-outs
Keep-Out Layer:
  the board outline again, w0.254

## Other copper
Top Layer:
  text "R1" at 44.577,5.461 h1.52
Bottom Layer:
  text "R2" at 46.863,5.461 h1.52

## Silkscreen, mask and mechanical layers (free items; w line width, h text height)
Top Overlay:
  text "TVP5150AM1" at 34.671,49.149 h1.3
  text "AV TO CSI" at 14.986,39.243 h1.52 r90

## Text inside footprints (layer, text, board x,y; h text height)
U1: Mechanical 13 "*" at 23.482,31.02 h1.27 r180